# EAGLE board untitled (EAGLE 7.2.0)
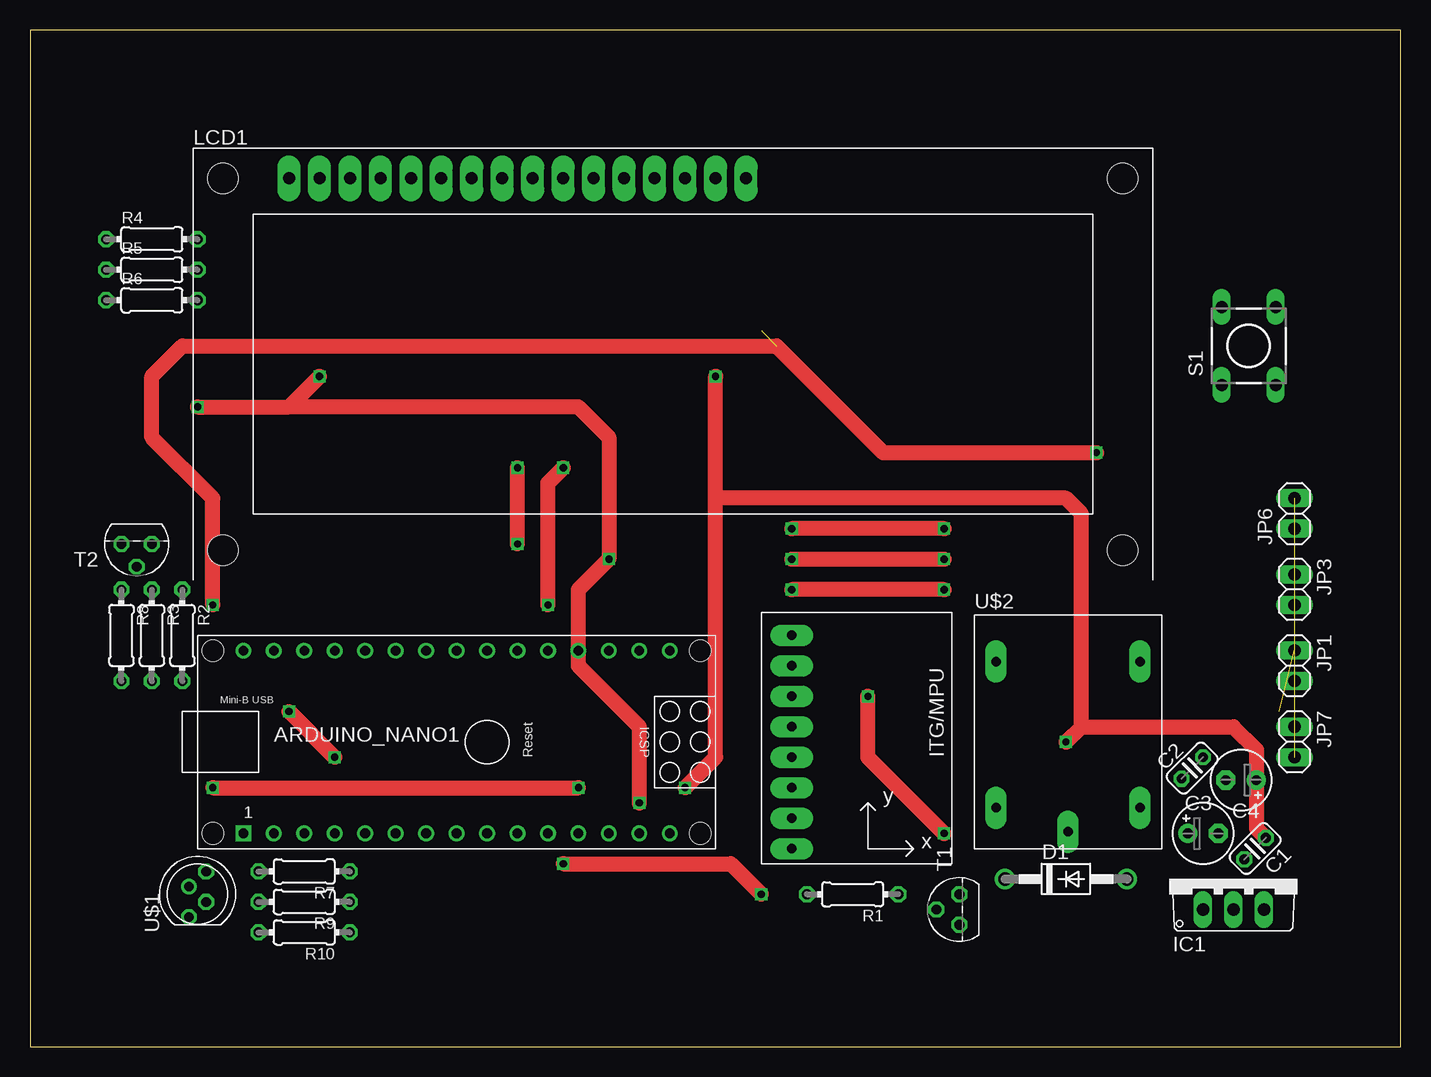
[diagram p0: board, top side]
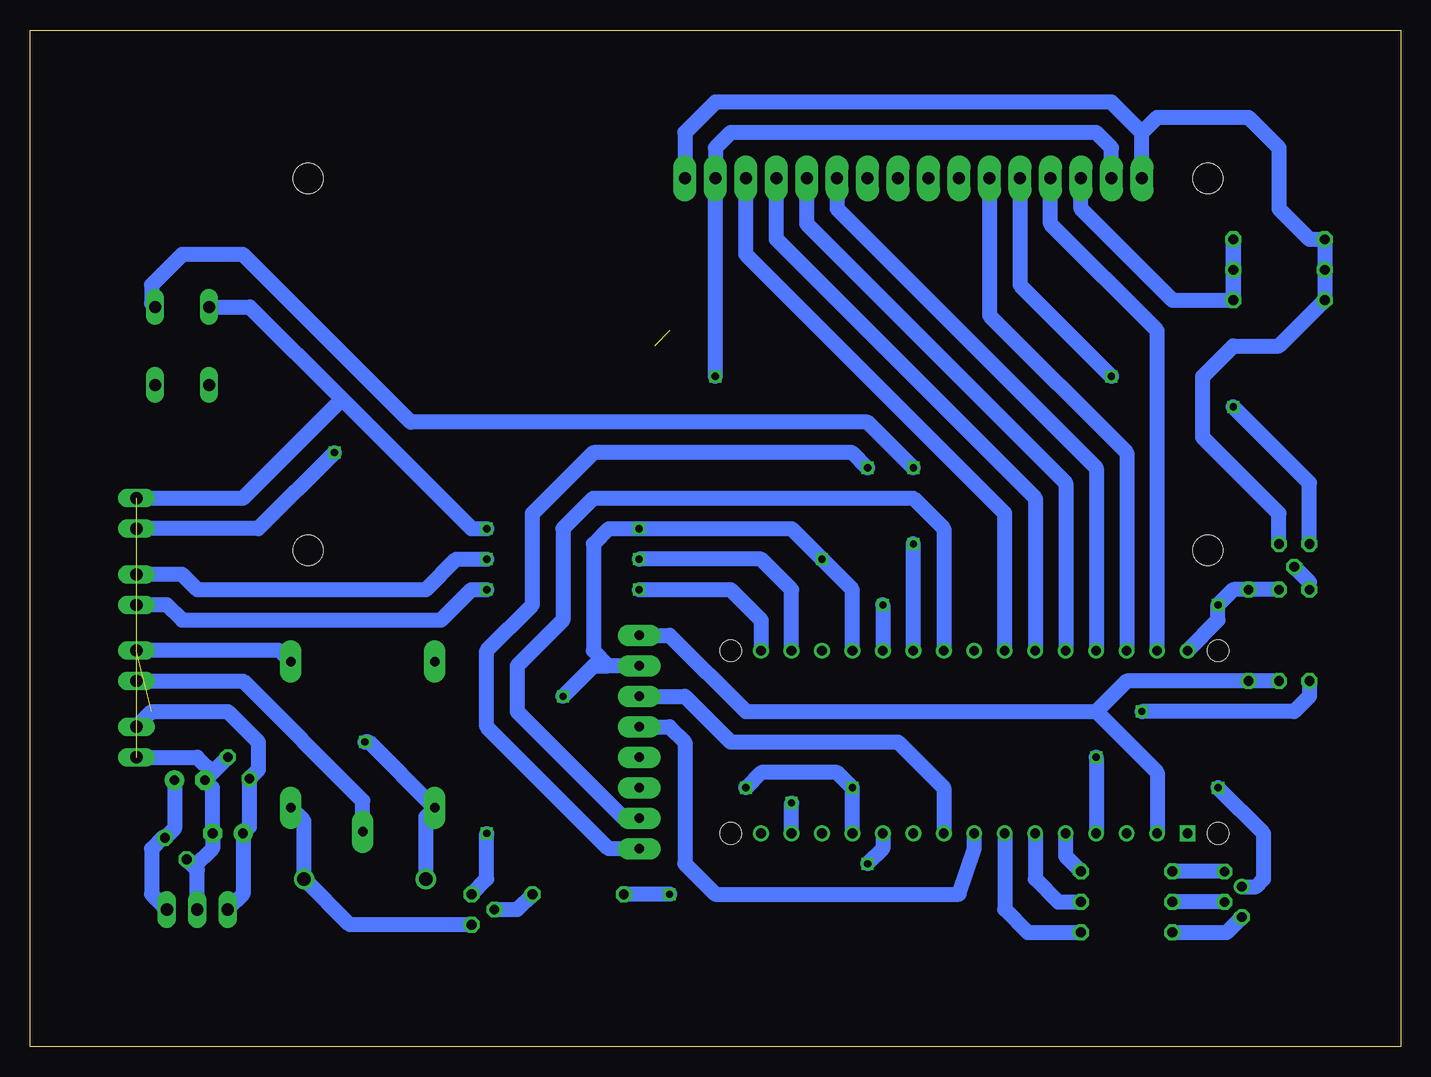
[diagram p1: board, bottom side, seen from below]

Size 114.28 x 84.76 mm. Coordinates in mm from the lower left corner, seen from the top.
Outline: 0,0 114.28,0 114.28,84.76 0,84.76 0,0
Copper layers (1*16): Top 0.035mm / dielectric 1.5mm / Bottom 0.035mm
Design rules "default": minimum track width 10mil, minimum drill 24mil, track to track 8mil, track to pad 8mil, pad to pad 8mil, via to via 8mil, smd to smd 8mil, copper to edge 40mil, drill to drill 8mil, minimum pad ring 10mil, minimum via ring 8mil, stop-mask expansion 4mil, vias tented up to drill 0mil, thermal gap 10mil

## Footprints (pad centres in the part's own frame; a part is rotated, then mirrored left to right if it is on the bottom)
ARDUINO_NANO = drill 0.8 square: 1 -20.32,-7.62 | drill 0.8: 2 -17.78,-7.62; 3 -15.24,-7.62; 4 -12.7,-7.62; 5 -10.16,-7.62; 6 -7.62,-7.62; 7 -5.08,-7.62; 8 -2.54,-7.62; 9 0,-7.62; 10 2.54,-7.62; 11 5.08,-7.62; 12 7.62,-7.62; 13 10.16,-7.62; 14 12.7,-7.62; 15 15.24,-7.62; 16 15.24,7.62; 17 12.7,7.62; 18 10.16,7.62; 19 7.62,7.62; 20 5.08,7.62; 21 2.54,7.62; 22 0,7.62; 23 -2.54,7.62; 24 -5.08,7.62; 25 -7.62,7.62; 26 -10.16,7.62; 27 -12.7,7.62; 28 -15.24,7.62; 29 -17.78,7.62; 30 -20.32,7.62 | hole 1.778: -22.86,-7.62; -22.86,7.62; 17.78,7.62; 17.78,-7.62
C025-024X044 = drill 0.813 octagon: 1 -1.27,0; 2 1.27,0
E2,5-5 = drill 0.813 pad 1.6: + -1.27,0 | drill 0.813 pad 1.6 octagon: - 1.27,0
DO41-10 = drill 1.118: A 5.08,0; C -5.08,0
TO220V = drill 1.016 long: 1 -2.54,-2.54; 2 0,-2.54; 3 2.54,-2.54
1X02 = drill 1.016 long: 1 -1.27,0; 2 1.27,0
HY-1602F = drill 1 pad 1.93 long: 1 2.54,0; 2 5.08,0; 3 7.62,0; 4 10.16,0; 5 12.7,0; 6 15.24,0; 7 17.78,0; 8 20.32,0; 9 22.86,0; 10 25.4,0; 11 27.94,0; 12 30.48,0; 13 33.02,0; 14 35.56,0; 15 38.1,0; 16 40.64,0 | hole 2.5: -2.96,0; 72.04,0; -2.96,-31; 72.04,-31
0204/7 = drill 0.813 octagon: 1 -3.81,0; 2 3.81,0
DTS-6 = drill 1 long: 1 -3.25,2.25; 2 3.25,2.25; 3 -3.25,-2.25; 4 3.25,-2.25
TO92 = drill 0.813 octagon: 1 1.27,0; 2 0,1.905; 3 -1.27,0
GY-521 = drill 0.8 pad 1.778 long: ADO -8.89,-6.35; GND -8.89,6.35; INT -8.89,-8.89; SCL -8.89,3.81; SDA -8.89,1.27; VCC -8.89,8.89; XCL -8.89,-3.81; XDA -8.89,-1.27
LED5MMRGB = drill 0.8 pad 0.813 octagon: P$1 -1.905,0.714; P$2 -0.635,-0.714; P$4 1.905,-0.714 | drill 0.8 pad 0.813: P$3 0.635,0.714
THT = drill 0.8 pad 1.778 long: 1 -5.82,-6.76; 2 6.18,-6.76; COM 0.18,-8.76; NC -5.82,5.44; NO 6.18,5.44

## Placement (x,y rotation side)
ARDUINO_NANO1  [ARDUINO_NANO]  38.1,25.4 0 top
C1  [C025-024X044]  102.13,16.51 225 top
C2  [C025-024X044]  96.89,23.23 45 top
C3  [E2,5-5]  100.97,22.23 180 top
C4  [E2,5-5]  97.79,17.78 0 top
D1  1N4004  [DO41-10]  86.36,13.97 0 top
IC1  786TV  [TO220V]  100.33,13.97 0 top
JP1  [1X02]  105.41,31.75 270 top
JP3  [1X02]  105.41,38.1 270 top
JP6  [1X02]  105.41,44.45 90 top
JP7  [1X02]  105.41,25.4 270 top
LCD1  LCD_2X16_SIL  [HY-1602F]  19.05,72.39 0 top
R1  [0204/7]  68.58,12.7 180 top
R2  [0204/7]  12.7,34.29 270 top
R3  [0204/7]  10.16,34.29 270 top
R4  [0204/7]  10.16,67.31 0 top
R5  [0204/7]  10.16,64.77 0 top
R6  [0204/7]  10.16,62.23 0 top
R7  [0204/7]  22.86,14.61 180 top
R8  [0204/7]  7.62,34.29 270 top
R9  [0204/7]  22.86,12.06 180 top
R10  [0204/7]  22.86,9.53 180 top
S1  DTS-6  [DTS-6]  101.6,58.42 90 top
T1  BC547  [TO92]  77.47,11.43 90 top
T2  BC547  [TO92]  8.89,41.91 180 top
U1  GY-521MPU6050  [GY-521]  72.39,25.4 0 top
U$1  5MMRGBLED  [LED5MMRGB]  13.97,12.7 90 top
U$2  NT73-2A-S12  [THT]  86.36,26.67 0 top

## Library data of the parts
ARDUINO_NANO1 = ArduinoNanoV30
C1-C4 R1-R10 = rcl
D1 = diode
IC1 = linear
JP1 JP3 JP6 JP7 = pinhead
LCD1 = lcd_2x16_led_backlight
S1 = switch-tact
T1 T2 = transistor
U1 = gy-521
U$1 = led_rgb
U$2 = NT73

## Nets
+3V3: ARDUINO_NANO1.2 R2.2 R3.2 U1.VCC
+5V: ARDUINO_NANO1.12 C1.1 C3.+ D1.C IC1.3 LCD1.2 LCD1.15 U$1.P$3 U$2.1
+12V: C2.1 C4.+ IC1.1 JP1.1 JP7.1 U$2.NO
A0: ARDUINO_NANO1.4 R8.2
A4: ARDUINO_NANO1.8 U1.SDA
A5: ARDUINO_NANO1.9 U1.SCL
A7: ARDUINO_NANO1.11 R1.2
D2: ARDUINO_NANO1.20 U1.INT
D4: ARDUINO_NANO1.22 U1.ADO
D5: ARDUINO_NANO1.23
D6: ARDUINO_NANO1.24 LCD1.14
D7: ARDUINO_NANO1.25 LCD1.13
D8: ARDUINO_NANO1.26 LCD1.12
D9: ARDUINO_NANO1.27 LCD1.11
D10: ARDUINO_NANO1.28 LCD1.6
D11: ARDUINO_NANO1.29 LCD1.4
GND: ARDUINO_NANO1.14 ARDUINO_NANO1.19 C1.2 C2.2 C3.- C4.- IC1.2 JP6.2 JP7.2 LCD1.5 S1.2 T1.1 T2.1 U1.GND
GNDSCREEN: LCD1.1 LCD1.16 R4.1 R5.1 R6.1 T2.3
INT1: ARDUINO_NANO1.21 S1.4
N$2: D1.A T1.3 U$2.2
N$3: R1.1 T1.2
N$4: JP1.2 U$2.COM
N$5: LCD1.3 R4.2 R5.2 R6.2
N$7: R7.2 U$1.P$4
N$8: R10.2 U$1.P$1
N$9: ARDUINO_NANO1.6 R9.1
N$10: ARDUINO_NANO1.5 R7.1
N$11: R8.1 T2.2
N$12: ARDUINO_NANO1.16 JP3.2
N$13: ARDUINO_NANO1.17 JP3.1
N$14: R9.2 U$1.P$2
N$15: ARDUINO_NANO1.30 JP6.1 R2.1 R3.1
N$16: ARDUINO_NANO1.7 R10.1
VIN: ARDUINO_NANO1.15

## Tracks (layer width: path | path; a pad name or v marks a point on that pad's centre or on a via)
+3V3
  Bottom 1.27: U1.VCC 60.96,34.29 54.61,27.94 25.4,27.94 | 25.4,27.94 20.32,22.86 ARDUINO_NANO1.2 | R3.2 R2.2 22.86,30.48 25.4,27.94
+5V  (via drill 0.6)
  Top 1.27: v54.61,21.59 57.15,24.13 57.15,45.72 | 57.15,45.72 v57.15,55.88 | v86.36,25.4 87.63,26.67 | 87.63,26.67 87.63,44.45 86.36,45.72 57.15,45.72 | 87.63,26.67 100.33,26.67 102.23,24.77 102.23,18.2 C1.1 | v15.24,21.59 v45.72,21.59
  Bottom 1.27: D1.C 81.28,19.17 U$2.1 86.03,25.4 v86.36,25.4 | LCD1.2 24.13,74.93 25.4,76.2 55.88,76.2 57.15,74.93 LCD1.15 v57.15,55.88 | ARDUINO_NANO1.12 v45.72,21.59 46.99,22.86 53.34,22.86 v54.61,21.59 | C3.+ 102.23,18.2 C1.1 103.24,17.41 104.14,16.51 104.14,12.7 IC1.3 | U$1.P$3 12.06,13.34 11.43,13.97 11.43,17.78 v15.24,21.59
+12V  (1 unrouted)
  Bottom 1.27: U$2.NO 93.45,33.02 JP1.1 | JP7.1 104.14,27.94 97.79,27.94 95.25,25.4 95.25,23.08 C2.1 95.99,18.31 C4.+ 96.52,12.7 IC1.1
A0  (via drill 0.6)
  Top 1.27: v21.59,27.94 v25.4,24.13
  Bottom 1.27: R8.2 7.62,29.21 8.89,27.94 v21.59,27.94 | v25.4,24.13 ARDUINO_NANO1.4
A4
  Bottom 1.27: U1.SDA 60.96,26.67 59.69,25.4 59.69,15.24 57.15,12.7 36.83,12.7 35.56,16.51 ARDUINO_NANO1.8
A5
  Bottom 1.27: U1.SCL 59.69,29.21 55.88,25.4 41.91,25.4 38.1,21.59 ARDUINO_NANO1.9
A7  (via drill 0.6)
  Top 1.27: v44.45,15.24 58.42,15.24 v60.96,12.7
  Bottom 1.27: ARDUINO_NANO1.11 43.18,16.51 v44.45,15.24 | v60.96,12.7 R1.2
D2  (via drill 0.6)
  Top 1.27: v43.18,36.83 43.18,46.99 v44.45,48.26
  Bottom 1.27: U1.INT 66.04,16.51 76.2,26.67 76.2,33.02 72.39,36.83 72.39,44.45 67.31,49.53 45.72,49.53 v44.45,48.26 | v43.18,36.83 ARDUINO_NANO1.20
D4
  Bottom 1.27: U1.ADO 64.77,19.05 73.66,27.94 73.66,31.75 69.85,35.56 69.85,43.18 67.31,45.72 40.64,45.72 38.1,43.18 ARDUINO_NANO1.22
D6
  Bottom 1.27: LCD1.14 54.61,66.04 33.02,44.45 ARDUINO_NANO1.24
D7
  Bottom 1.27: LCD1.13 52.07,67.31 30.48,45.72 ARDUINO_NANO1.25
D8
  Bottom 1.27: LCD1.12 49.53,68.58 27.94,46.99 ARDUINO_NANO1.26
D9
  Bottom 1.27: LCD1.11 46.99,69.85 25.4,48.26 ARDUINO_NANO1.27
D10
  Bottom 1.27: LCD1.6 34.29,60.96 22.86,49.53 ARDUINO_NANO1.28
D11
  Bottom 1.27: ARDUINO_NANO1.29 20.32,59.69 29.21,68.58 LCD1.4
GND  (via drill 0.6)  (1 unrouted)
  Top 1.27: v13.97,53.34 21.59,53.34 | v50.8,20.32 50.8,26.67 45.72,31.75 45.72,38.1 v48.26,40.64 48.26,50.8 45.72,53.34 21.59,53.34 | v76.2,43.18 v63.5,43.18 | v76.2,17.78 69.85,24.13 v69.85,29.21 | v24.13,55.88 21.59,53.34
  Bottom 1.27: U1.GND 66.04,31.75 | 66.04,31.75 67.31,33.02 67.31,41.91 66.04,43.18 v63.5,43.18 50.8,43.18 v48.26,40.64 45.72,38.1 ARDUINO_NANO1.19 | LCD1.5 31.75,63.5 v24.13,55.88 | T2.1 7.62,46.99 v13.97,53.34 | ARDUINO_NANO1.14 v50.8,20.32 | S1.2 95.96,61.67 88.27,53.98 | 88.27,53.98 77.47,43.18 v76.2,43.18 | T1.1 76.2,13.97 v76.2,17.78 | v69.85,29.21 67.31,31.75 66.04,31.75 | JP6.2 96.52,45.72 88.27,53.98 | IC1.2 100.33,14.71 100.59,14.98 | 100.59,14.98 C1.2 | 100.59,14.98 99.06,16.51 C4.- 99.06,21.59 C3.- 99.06,22.86 | C2.2 99.06,22.86 | JP7.2 100.33,24.13 99.06,22.86
GNDSCREEN
  Bottom 1.27: 21.59,71.12 LCD1.1 21.59,76.2 | 21.59,76.2 24.13,78.74 57.15,78.74 59.69,76.2 LCD1.16 | T2.3 10.16,44.45 16.51,50.8 16.51,55.88 13.97,58.42 10.16,58.42 R6.1 R5.1 R4.1 7.62,67.31 10.16,69.85 10.16,74.93 12.7,77.47 20.32,77.47 21.59,76.2
INT1  (via drill 0.6)
  Top 1.27: v40.64,41.91 v40.64,48.26
  Bottom 1.27: ARDUINO_NANO1.21 v40.64,41.91 | v40.64,48.26 44.45,52.07 82.55,52.07 96.52,66.04 101.6,66.04 104.14,63.5 104.14,61.96 S1.4
N$2
  Bottom 1.27: U$2.2 91.44,18.81 D1.A 87.63,10.16 T1.3
N$3
  Bottom 1.27: T1.2 73.66,11.43 R1.1
N$4
  Bottom 1.27: U$2.COM 86.54,20.5 96.52,30.48 JP1.2
N$5
  Bottom 1.27: R6.2 R5.2 R4.2 R6.2 | LCD1.3 26.67,69.85 19.05,62.23 R6.2
N$7
  Bottom 1.27: U$1.P$4 R7.2
N$8
  Bottom 1.27: R10.2 14.53,9.53 U$1.P$1
N$9
  Bottom 1.27: ARDUINO_NANO1.6 30.48,13.97 28.57,12.06 R9.1
N$10
  Bottom 1.27: R7.1 27.94,15.88 ARDUINO_NANO1.5
N$11
  Bottom 1.27: R8.1 7.62,38.73 T2.2
N$12  (via drill 0.6)
  Top 1.27: v76.2,38.1 v63.5,38.1
  Bottom 1.27: v63.5,38.1 55.88,38.1 53.34,35.56 ARDUINO_NANO1.16 | v76.2,38.1 77.47,38.1 80.01,35.56 101.6,35.56 102.87,36.83 JP3.2
N$13  (via drill 0.6)
  Top 1.27: v63.5,40.64 v76.2,40.64
  Bottom 1.27: ARDUINO_NANO1.17 50.8,38.1 53.34,40.64 v63.5,40.64 | v76.2,40.64 78.74,40.64 81.28,38.1 100.33,38.1 101.6,39.37 JP3.1
N$14
  Bottom 1.27: U$1.P$2 R9.2
N$15  (via drill 0.6)  (1 unrouted)
  Top 1.27: v15.24,36.83 15.24,45.72 10.16,50.8 10.16,55.88 12.7,58.42 62.23,58.42 71.12,49.53 v88.9,49.53
  Bottom 1.27: R3.1 R2.1 13.97,38.1 v15.24,36.83 15.24,35.56 ARDUINO_NANO1.30 | v88.9,49.53 95.25,43.18 JP6.1
N$16
  Bottom 1.27: ARDUINO_NANO1.7 33.02,11.43 31.11,9.53 R10.1